# Altium PCB MicroMouse.PcbDoc (part 2 of 2)
Units mm, origin at the board's own origin, x right, y up, seen from the top; angles counter-clockwise.
Board outline 120.52 x 100.98 mm, 4 copper layers (Top Copper, Signal Layer 1, Signal Layer 2, Bottom Copper), stack 1.57 mm thick; 103 components, 72 nets, 374 pads, 447 vias.
Unrouted connection lines stored in the file: 1.
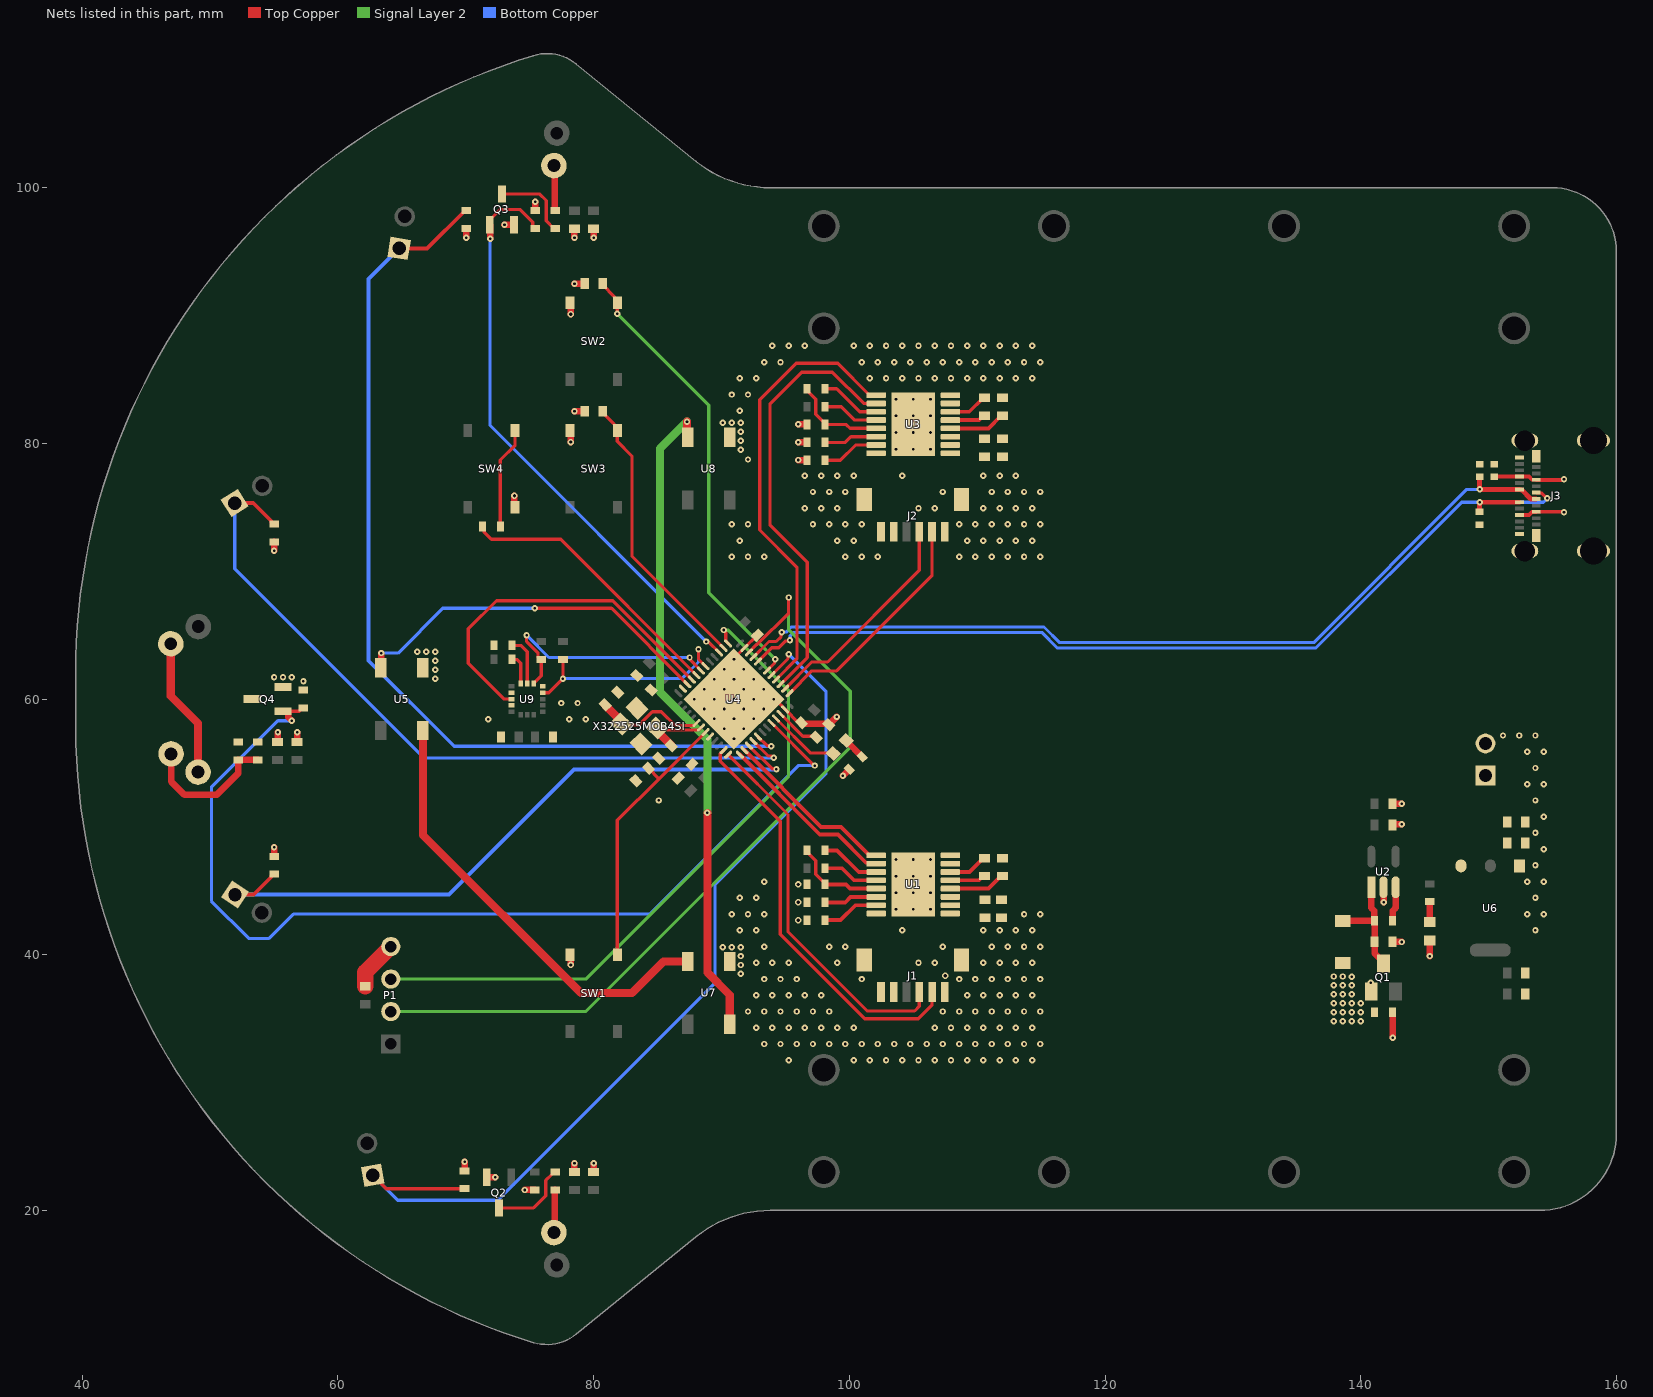
[diagram p4: the nets of this part, all layers, seen from the top]

## Via types
v1: diameter 0.5, hole 0.2, Top Copper to Bottom Copper, tented top, 353 vias
v2: diameter 0.5, hole 0.2, Top Copper to Bottom Copper, 61 vias
v3: diameter 0.508, hole 0.254, Top Copper to Bottom Copper, tented top, 33 vias

## Nets (pads, with @x,y where several pads share a name; then routed paths per layer and width w, separated by ;. In a path a pad name is that pad's centre, name@x,y a point inside that pad or via, vN(x,y) a via of type N, cw(c..) or ccw(c..) an arc to the next point about the centre after c; other vN are vias at no path point) (continued)
Emitter2_3: Q4.1 R25.2 U4.20 | length 78.7
  Top Copper w0.254: U4.20@93.912,58.126 93.915,58.126 97.241,54.8 v1(97.3,54.8)
  Top Copper w0.305: Q4.1@56.075,59.05 56.95,59.05 57.2,59.3 R25.2@57.3,59.3
  Top Copper w0.508: Q4.1@55.7,59.05 56.075,59.05 56.121,59.004 56.121,58.579 v1(56.4,58.3)
  Bottom Copper w0.254: v1(56.4,58.3) 55.3,58.3 50.1,53.1 50.1,44.2 53.025,41.275 54.61,41.275 56.515,43.18 84.38,43.18 96,54.8 v1(97.3,54.8)
Emitter4: Q3.1 R24.2 U4.39 | length 46.1
  Top Copper w0.254: Q3.1@71.875,97.1 71.875,97.475 72.7,98.3 74.225,98.3 75.235,97.29 75.235,96.948 75.383,96.8 R24.2@75.425,96.8 ; v1(88.8,64.5) 88.847,64.453 89,64.453 U4.39@89.811,63.642
  Top Copper w0.508: Q3.1@71.875,97.1 71.9,97.075 v1(71.9,96)
  Bottom Copper w0.254: v1(71.9,96) 71.9,81.4 v1(88.8,64.5)
EN_Left: U1.1 U4.14 | length 13.7
  Top Copper w0.305: U4.14@91.791,56.005 97.796,50 99.35,50 101.575,47.775 U1.1@102.1,47.775
EN_Right: U3.1 U4.28 | length 35.1
  Top Copper w0.254: U4.28@94.266,61.52 95.9,63.155 95.9,70.323 93,73.223 93,83.43 95.835,86.265 99.085,86.265 101.575,83.775 U3.1@102.1,83.775
GND: C3.2 C4.2 C5.2 C6.2 C9.1 C10.2 C11.2 C12.1 C13.1 C14.1 C15.1 C16.1 C17.1 C18.2 C19.1 C20.1 C21.2 C22.2 C23.2 C24.2 C25.2 C26.2 C27.2 C28.1 C29.1 C30.2 C31.2 C32.2 C33.2 C34.2 C35.2 C36.2 D2.A D3.A D4.A D12.2 J1.6 J1.7 J1.8 J2.6 J2.7 J2.8 J3.1 J3.2 J3.3 J3.4 J3.A1 J3.A12 J3.B1 J3.B12 J4.2 P1.4 Q2.2 Q3.2 Q4.2 R1.1 R2.1 R3.2 R5.2 R7.1 R8.1 R9.1 R16.1 R18.1 R23.1 R24.1 R25.1 R26.1 R27.1 R28.1 R29.1 SW1.2 SW2.2 SW3.2 SW4.3 U1.9 U1.15 U1.16 U1.17 U2.2 U3.9 U3.15 U3.16 U3.17 U4.8 U4.23 U4.35 U4.47 U4.49 U5.3 U6.1 U7.3 U8.3 U9.5 U9.10 U9.12 X322525MOB4SI.2 X322525MOB4SI.4 | length 37.2
  Top Copper w0.254: v2(90.978,63.111) 90.978,63.182 U4.35@91.791,63.995 C23.2@92.795,64.999 ; v2(94.089,60) 94.16,60 U4.23@94.973,59.187 94.976,59.187 96.005,58.157 C22.2@96.262,58.157
  Top Copper w0.508: R26.1@55,47.7 v1(55,48.4) ; v1(55,71.6) R27.1@55,72.3 ; C15.1@55.262,56.636 55.306,56.68 v1(55.306,57.394) ; C14.1@56.786,56.636 56.8,56.65 v1(56.8,57.4) ; R29.1@69.9,23.1 v1(69.9,23.8) ; v1(70.025,96.1) R28.1@70.025,96.8 ; Q2.2@71.65,22.6 v1(72.3,22.6) ; v1(73.025,97.1) Q3.2@73.775,97.1 ; v3(73.8,75.9) 73.8,75.05 SW4.3@73.85,75 ; v1(74.6,21.6) R23.1@75.4,21.6 ; R24.1@75.425,98.2 v1(75.425,98.9) ; SW1.2@78.15,40 78.2,39.95 v3(78.2,39.2) ; SW3.2@78.15,81.012 78.2,80.962 v3(78.2,80.1) ; SW2.2@78.15,91 78.2,90.95 v3(78.2,90.1) ; C13.1@78.5,23 v1(78.5,23.7) ; v1(78.5,82.5) C35.2@79.288,82.5 ; v1(78.5,92.5) C34.2@79.288,92.5 ; v1(78.5,96.1) C17.1@78.5,96.8 ; C12.1@80,23 v1(80,23.7) ; v1(80,96.1) C16.1@80,96.8 ; v1(96,78.7) 96.661,78.7 R8.1@96.68,78.681 ; v1(96,80.1) 96.659,80.1 R7.1@96.68,80.078 R7.1@96.68,80.078 ; v1(96,81.5) 96.659,81.5 96.68,81.479 R5.2@96.68,81.475 ; C22.2@96.262,58.157 96.332,58.086 98.212,58.086 98.294,58.004 98.404,58.004 v1(99,58.6) ; v1(99.5,54) R16.1@100.005,54.505 ; U2.2@141.78,45.277 141.8,45.257 v1(141.8,44.1) ; C29.1@142.48,41.017 142.497,41 v1(143.2,41) ; C20.1@142.48,50.161 142.519,50.2 v1(143.2,50.2) ; C28.1@142.48,51.812 142.492,51.8 v1(143.2,51.8) ; R9.1@142.491,35.496 142.491,33.509 v1(142.5,33.5) ; v1(145.4,39.9) D12.2@145.4,41.124
  Top Copper w1.27: C36.2@62.135,37.53 62.135,38.64 P1.4@64.135,40.64
  other v1: 95.25,31.75 100.33,31.75 101.6,31.75 102.87,31.75 104.14,31.75 105.41,31.75 106.68,31.75 107.95,31.75 109.22,31.75 110.49,31.75 111.76,31.75 113.03,31.75 114.3,31.75 93.345,33.02 94.615,33.02 95.885,33.02 97.155,33.02 98.425,33.02 99.695,33.02 100.965,33.02 102.235,33.02 103.505,33.02 104.775,33.02 106.045,33.02 107.315,33.02 108.585,33.02 109.855,33.02 111.125,33.02 112.395,33.02 113.665,33.02 114.935,33.02 92.71,34.29 93.98,34.29 95.25,34.29 96.52,34.29 97.79,34.29 99.06,34.29 100.33,34.29 106.68,34.29 107.95,34.29 109.22,34.29 110.49,34.29 111.76,34.29 113.03,34.29 114.3,34.29 92.075,35.56 93.345,35.56 94.615,35.56 95.885,35.56 97.155,35.56 98.425,35.56 107.315,35.56 108.585,35.56 109.855,35.56 111.125,35.56 112.395,35.56 113.665,35.56 114.935,35.56 92.71,36.83 93.98,36.83 95.25,36.83 96.52,36.83 97.79,36.83 109.22,36.83 110.49,36.83 111.76,36.83 113.03,36.83 114.3,36.83 93.345,38.1 94.615,38.1 95.885,38.1 100.965,38.1 108.585,38.1 109.855,38.1 111.125,38.1 112.395,38.1 113.665,38.1 114.935,38.1 91.5,38.5 91.5,39.2 92.71,39.37 93.98,39.37 95.25,39.37 99.06,39.37 105.41,39.37 106.68,39.37 110.49,39.37 111.76,39.37 113.03,39.37 114.3,39.37 91.5,39.9 90.1,40.6 90.8,40.6 91.5,40.6 93.345,40.64 98.425,40.64 99.695,40.64 107.315,40.64 111.125,40.64 112.395,40.64 113.665,40.64 114.935,40.64 91.44,41.91 92.71,41.91 104.14,41.91 110.49,41.91 111.76,41.91 113.03,41.91 114.3,41.91 153.67,41.91 90.805,43.18 92.075,43.18 93.345,43.18 113.665,43.18 114.935,43.18 153.035,43.18 154.305,43.18 91.44,44.45 92.71,44.45 153.67,44.45 93.345,45.72 153.035,45.72 154.305,45.72 153.67,46.99 154.305,48.26 153.67,49.53 154.305,50.8 85.09,52.07 153.67,52.07 153.035,53.34 154.305,53.34 153.67,54.61 153.035,55.88 154.305,55.88 151.13,57.15 152.4,57.15 153.67,57.15 71.755,58.42 78.105,58.42 79.375,58.42 77.47,59.69 78.74,59.69 57.3,61.4 67.6,61.6 55,61.7 55.7,61.7 56.4,61.7 67.6,62.3 67.6,63 66.2,63.7 66.9,63.7 67.6,63.7 90.805,71.12 92.075,71.12 93.345,71.12 99.695,71.12 100.965,71.12 102.235,71.12 108.585,71.12 109.855,71.12 111.125,71.12 112.395,71.12 113.665,71.12 114.935,71.12 91.44,72.39 99.06,72.39 100.33,72.39 109.22,72.39 110.49,72.39 111.76,72.39 113.03,72.39 114.3,72.39 90.805,73.66 92.075,73.66 97.155,73.66 98.425,73.66 99.695,73.66 100.965,73.66 108.585,73.66 109.855,73.66 111.125,73.66 112.395,73.66 113.665,73.66 114.935,73.66 96.52,74.93 97.79,74.93 99.06,74.93 105.41,74.93 106.68,74.93 110.49,74.93 111.76,74.93 113.03,74.93 114.3,74.93 97.155,76.2 98.425,76.2 99.695,76.2 107.315,76.2 111.125,76.2 112.395,76.2 113.665,76.2 114.935,76.2 96.52,77.47 97.79,77.47 99.06,77.47 100.33,77.47 104.14,77.47 110.49,77.47 111.76,77.47 113.03,77.47 92.075,78.74 91.5,79.5 91.5,80.2 91.5,80.9 90.1,81.6 90.8,81.6 91.5,81.6 91.44,82.55 90.805,83.82 92.075,83.82 91.44,85.09 92.71,85.09 101.6,85.09 102.87,85.09 104.14,85.09 105.41,85.09 106.68,85.09 107.95,85.09 109.22,85.09 110.49,85.09 111.76,85.09 113.03,85.09 114.3,85.09 93.345,86.36 94.615,86.36 100.965,86.36 102.235,86.36 103.505,86.36 104.775,86.36 106.045,86.36 107.315,86.36 108.585,86.36 109.855,86.36 111.125,86.36 112.395,86.36 113.665,86.36 114.935,86.36 93.98,87.63 95.25,87.63 96.52,87.63 100.33,87.63 101.6,87.63 102.87,87.63 104.14,87.63 105.41,87.63 106.68,87.63 107.95,87.63 109.22,87.63 110.49,87.63 111.76,87.63 113.03,87.63 114.3,87.63
  other v2: 103.65,43.55 105,43.55 106.35,43.55 103.65,44.85 105,44.85 106.35,44.85 103.65,46.15 105,46.15 106.35,46.15 103.65,47.45 105,47.45 106.35,47.45 90.978,56.889 90.2,57.667 91.755,57.667 89.422,58.444 90.978,58.444 92.533,58.444 88.644,59.222 90.2,59.222 91.755,59.222 93.311,59.222 87.866,60 89.422,60 90.978,60 92.533,60 88.644,60.778 90.2,60.778 91.755,60.778 93.311,60.778 89.422,61.556 90.978,61.556 92.533,61.556 90.2,62.333 91.755,62.333 103.65,79.55 105,79.55 106.35,79.55 103.65,80.85 105,80.85 106.35,80.85 103.65,82.15 105,82.15 106.35,82.15 103.65,83.45 105,83.45 106.35,83.45
  other v3: 107.5,38.356 96,42.7 96,44.1 96,45.5
IMU_INT: U4.45 U9.11 | length 28.2
  Top Copper w0.254: U9.11@73.575,60 73,60 70.2,62.8 70.2,65.5 72.4,67.7 81.51,67.7 U4.45@87.69,61.52
Left_EncoderA: J1.4 U4.12 | length 29.9
  Top Copper w0.254: U4.12@90.518,55.651 95.2,50.969 95.2,41.8 101.4,35.6 105.1,35.6 105.476,35.976 J1.4@105.476,37.081
Left_EncoderB: J1.5 U4.11 | length 32.5
  Top Copper w0.254: U4.11@90.164,56.005 89.9,55.74 89.9,55.14 94.6,50.44 94.6,41.6 101.2,35 105.4,35 106.474,36.074 106.474,37.079 J1.5@106.476,37.081
M1_Left: J1.1 U1.8
M1_Right: J2.1 U3.8
M2_Left: J1.2 U1.10
M2_Right: J2.2 U3.10
MCU_I2C1_SCL: R10.1 U4.42 U9.4 | length 17.2
  Top Copper w0.254: U9.4@76.025,60.5 76.5,60.5 v1(77.6,61.6) R10.1@77.6,63.1 ; v1(88.2,63.9) 88.2,63.131 U4.42@88.75,62.581
  Bottom Copper w0.254: v1(77.6,61.6) 86.9,61.6 88.2,62.9 v1(88.2,63.9)
MCU_I2C1_SDA: R14.1 U4.43 U9.6 | length 19.4
  Top Copper w0.254: v1(74.75,65) 74.75,64.5 75.652,63.598 75.652,63.248 75.8,63.1 R14.1@75.9,63.1 75.9,61.825 U9.6@75.3,61.225 ; v1(87.5,63.25) 87.547,63.203 87.547,63.077 U4.43@88.397,62.227
  Bottom Copper w0.254: v1(74.75,65) 76.5,63.25 v1(87.5,63.25)
MCU_LED: D5.1 U4.21 | length 5.6
  Top Copper w0.254: U4.21@94.266,58.48 96.969,55.776 98.706,55.776 D5.1@98.741,55.741
MCU_LED_K: D5.2 R16.2 | length 1.7
  Top Copper w0.508: D5.2@99.759,56.731 R16.2@100.995,55.495
MCU_OSC_IN: C11.1 U4.5 X322525MOB4SI.1 | length 8.9
  Top Copper w0.254: X322525MOB4SI.1@82.152,58.049 82.223,57.978 83.578,57.978 84.6,59 85.3,59 86.365,57.935 87.851,57.935 U4.5@88.043,58.126
  Top Copper w0.635: C11.1@80.895,59.554 80.895,59.543 82.152,58.286 X322525MOB4SI.1@82.152,58.049
MCU_OSC_OUT: C18.1 U4.6 X322525MOB4SI.3 | length 5.4
  Top Copper w0.254: X322525MOB4SI.3@84.945,57.731 85.614,57.731 85.764,57.581 88.205,57.581 U4.6@88.397,57.773
  Top Copper w0.635: X322525MOB4SI.3@84.945,57.731 84.945,57.494 86.076,56.364 C18.1@86.076,56.353
MCU_USB_D_N: D3.C J3.A6 J3.B6 U4.32 | length 73.2
  Top Copper w0.254: U4.32@92.851,62.934 93.922,64.005 94.48,64.005 95.025,64.551 95.309,64.551 v2(95.356,64.598) ; J3.B6@153.73,76.15 153.753,76.127 154.135,76.127 154.562,75.7 v2(154.6,75.7)
  Top Copper w0.381: D3.C@149.298,74.638 D3.C@149.298,74.638 149.299,75.399 v2(149.3,75.4) J3.A6@152.43,75.4
  Bottom Copper w0.254: v2(95.356,64.598) 95.379,64.622 95.379,64.958 95.633,65.212 115.052,65.212 116.268,63.997 136.497,63.997 147.9,75.4 v2(149.3,75.4) 154.3,75.4 v2(154.6,75.7)
MCU_USB_D_P: D4.C J3.A7 J3.B7 U4.33 | length 68.9
  Top Copper w0.254: U4.33@92.498,63.288 93.715,64.505 94.273,64.505 94.657,64.89 94.657,65.173 v2(94.705,65.22)
  Top Copper w0.381: D4.C@149.304,77.376 149.302,77.374 149.302,76.402 v2(149.3,76.4) J3.A7@152.43,76.4 ; J3.A7@152.59,76.359 153.299,75.65 J3.B7@153.73,75.65
  Bottom Copper w0.254: v2(94.705,65.22) 94.728,65.244 95.065,65.244 95.458,65.636 115.228,65.636 116.443,64.421 136.321,64.421 148.3,76.4 v2(149.3,76.4)
NetC1_1: C1.1 U1.14 | length 3.1
  Top Copper w0.305: U1.14@107.9,46.475 109.398,46.475 110.479,47.556 C1.1@110.579,47.556
NetC1_2: C1.2 U1.13 | length 2.8
  Top Copper w0.305: U1.13@107.9,45.825 110.148,45.825 110.479,46.156 C1.2@110.579,46.156
NetC7_1: C7.1 U3.14 | length 3.1
  Top Copper w0.305: U3.14@107.9,82.475 109.381,82.475 110.471,83.565 C7.1@110.571,83.565
NetC7_2: C7.2 U3.13 | length 2.8
  Top Copper w0.305: U3.13@107.9,81.825 110.131,81.825 110.471,82.165 C7.2@110.571,82.165
NetC9_2: C9.2 U4.22 | length 3.5
  Top Copper w0.254: U4.22@94.619,58.833 96.368,57.085 97.334,57.085 C9.2@97.405,57.014
NetC29_2: C29.2 D1.1 Q1.3 R30.1 U2.1 | length 8.6
  Top Copper w0.508: D1.1@138.63,42.668 R30.1@141.08,42.668 141.059,42.689 141.059,43.433 140.83,43.662 U2.1@140.83,45.277 ; R30.1@141.08,42.589 C29.2@141.08,41.017 141.08,40.123 Q1.3@141.78,39.423
NetD6_1: D6.1 R11.2 | length 3.4
  Top Copper w0.508: D6.1@76.889,18.265 76.945,18.321 76.945,21.579 76.966,21.6 R11.2@77,21.6
NetD7_1: D7.1 D11.2 | length 10.9
  Top Copper w0.635: D7.1@46.923,64.327 46.923,60.243 49.053,58.113 D11.2@49.053,54.29
NetD8_1: D8.1 R20.2 | length 3.6
  Top Copper w0.508: D8.1@76.889,101.732 76.945,101.676 76.945,98.221 76.966,98.2 R20.2@77,98.2
NetD11_1: D11.1 R21.1 R22.1 | length 11.1
  Top Copper w0.508: D11.1@46.947,55.71 46.947,53.553 48,52.5 50.5,52.5 52.214,54.214 R21.1@52.214,55.236 R22.1@53.738,55.236
NetD12_1: D12.1 R31.1 | length 1.6
  Top Copper w0.508: D12.1@145.4,42.564 R31.1@145.4,44.15
NetQ2_3: Q2.3 R11.1 | length 6.3
  Top Copper w0.254: Q2.3@72.6,20.2 75.3,20.2 76.25,21.15 76.25,22.35 76.752,22.852 76.9,23 R11.1@77,23
NetQ3_3: Q3.3 R20.1 | length 6.2
  Top Copper w0.254: Q3.3@72.825,99.5 75.8,99.5 76.3,99 76.3,97.4 76.9,96.8 R20.1@77,96.8
NetQ4_3: Q4.3 R21.2 R22.2
NetR1_2: R1.2 U1.6 | length 4.2
  Top Copper w0.305: R1.2@98.08,44.103 99.678,44.103 100.1,44.525 U1.6@102.1,44.525
NetR2_2: R2.2 U1.7 | length 4.5
  Top Copper w0.3: R2.2@98.08,42.706 99.306,42.706 100.475,43.875 U1.7@102.1,43.875
NetR3_1: R3.1 R4.2 U1.5 | length 7.4
  Top Copper w0.254: R4.2@96.68,48.167 96.68,48.067 97.38,47.367 97.38,46.3 98.08,45.6 R3.1@98.08,45.5
  Top Copper w0.305: R3.1@98.08,45.5 99.726,45.5 100.051,45.175 U1.5@102.1,45.175
NetR4_1: R4.1 U1.3 | length 4.7
  Top Copper w0.305: R4.1@98.08,48.167 99.043,48.167 100.735,46.475 U1.3@102.1,46.475
NetR5_1: R5.1 R6.2 U3.5 | length 7.5
  Top Copper w0.254: R6.2@96.68,84.269 96.68,84.169 97.38,83.469 97.38,82.275 98.08,81.575 R5.1@98.08,81.475 99.752,81.475 100.051,81.175 U3.5@102.1,81.175
NetR6_1: R6.1 U3.3 | length 4.8
  Top Copper w0.254: R6.1@98.08,84.269 99.005,84.269 100.798,82.475 U3.3@102.1,82.475
NetR7_2: R7.2 U3.6 | length 4.2
  Top Copper w0.254: R7.2@98.08,80.078 99.678,80.078 100.125,80.525 U3.6@102.1,80.525
NetR8_2: R8.2 U3.7 | length 4.5
  Top Copper w0.254: R8.2@98.08,78.681 99.304,78.681 100.499,79.875 U3.7@102.1,79.875
NetR12_2: R12.2 U1.4 | length 4.4
  Top Copper w0.305: R12.2@98.08,46.77 99.416,46.77 100.361,45.825 U1.4@102.1,45.825
NetR13_2: R13.2 U3.4 | length 4.5
  Top Copper w0.254: R13.2@98.08,82.872 99.378,82.872 100.425,81.825 U3.4@102.1,81.825
NetR17_1: R17.1 SW4.4 | length 8
  Top Copper w0.254: R17.1@72.7,73.5 72.7,78.7 73.85,79.85 SW4.4@73.85,81
NetR17_2: R17.2 U4.44 | length 21.7
  Top Copper w0.254: R17.2@71.3,73.5 71.448,73.352 71.448,73.052 72,72.5 77.417,72.5 U4.44@88.043,61.874
NetR18_2: R18.2 U9.7 | length 3.9
  Top Copper w0.254: R18.2@73.6,64.2 74.3,64.2 74.8,63.7 U9.7@74.8,61.225
NetR19_2: R19.2 U9.8 | length 2.4
  Top Copper w0.254: R19.2@73.6,63.1 74,63.1 74.3,62.8 U9.8@74.3,61.225
NetR30_2: R30.2 U2.3 | length 2.7
  Top Copper w0.508: R30.2@142.48,42.668 142.501,42.689 142.501,43.433 142.73,43.662 U2.3@142.73,45.277
NetU5_2: U5.2 U7.4 | length 35
  Top Copper w0.635: U5.2@66.65,57.55 66.65,49.35 79,37 83,37 85.462,39.462 U7.4@87.35,39.462
NetU7_2: U7.2 U8.4 | length 51.5
  Top Copper w0.635: v1(87.3,81.7) 87.3,80.523 U8.4@87.35,80.473 ; v1(88.9,51.1) 88.9,38.6 90.65,36.85 U7.2@90.65,34.562
  Signal Layer 2 w0.635: v1(87.3,81.7) 85.2,79.6 85.2,60.545 88.9,56.845 v1(88.9,51.1)
PH_Left: U1.2 U4.13 | length 14.2
  Top Copper w0.305: U4.13@91.437,55.651 97.688,49.4 99.1,49.4 101.302,47.198 102.027,47.198 U1.2@102.1,47.125
PH_Right: U3.2 U4.27 | length 34.3
  Top Copper w0.254: U4.27@94.619,61.167 96.7,63.248 96.7,70.7 93.8,73.6 93.8,83.094 96.271,85.565 98.671,85.565 101.112,83.125 U3.2@102.1,83.125
PROG1: C34.1 SW2.4 U4.30 | length 36.1
  Top Copper w0.254: C34.1@80.7,92.512 80.7,92.412 81.627,91.485 81.627,91.223 SW2.4@81.85,91 v2(81.85,90.15) ; U4.30@93.559,62.227 94.153,62.822 94.153,63.053 v2(94.2,63.1)
  Signal Layer 2 w0.254: v2(81.85,90.15) 89,83 89,68.3 v2(94.2,63.1)
PROG2: C35.1 SW3.4 U4.38 | length 22.4
  Top Copper w0.254: C35.1@80.7,82.512 80.7,82.412 81.627,81.485 81.627,81.235 SW3.4@81.85,81.012 81.85,80.15 83,79 83,71.16 U4.38@90.164,63.995
Receiver1: D9.1 R26.2 U4.15 | length 53.1
  Top Copper w0.254: U4.15@92.144,56.358 93.959,54.544 94.256,54.544 v1(94.3,54.5)
  Top Copper w0.305: D9.1@51.947,44.71 53.41,44.71 54.777,46.077 54.777,46.177 54.9,46.3 R26.2@55,46.3
  Bottom Copper w0.305: D9.1@51.947,44.71 68.681,44.71 78.471,54.5 v1(94.3,54.5)
Receiver2: D10.1 R27.2 U4.16 | length 59.4
  Top Copper w0.254: U4.16@92.498,56.712 93.663,55.547 93.886,55.547 94.033,55.4 v1(94.1,55.4)
  Top Copper w0.305: D10.1@51.923,75.327 53.373,75.327 54.777,73.923 54.777,73.823 54.9,73.7 R27.2@55,73.7
  Bottom Copper w0.254: D10.1@51.923,75.327 51.923,70.177 66.7,55.4 v1(94.1,55.4)
Receiver3: D16.1 R28.2 U4.17 | length 75.4
  Top Copper w0.254: U4.17@92.851,57.066 93.57,56.347 93.866,56.347 v1(93.906,56.306)
  Top Copper w0.305: D16.1@64.779,95.249 66.974,95.249 69.925,98.2 R28.2@70.025,98.2
  Bottom Copper w0.305: D16.1@64.779,95.249 62.4,92.87 62.4,63 69.094,56.306 v1(93.906,56.306)
Receiver4: D15.1 R29.2 U4.29 | length 74.9
  Top Copper w0.254: D15.1@62.721,22.749 63.77,21.7 R29.2@69.9,21.7 ; U4.29@93.912,61.874 95.203,63.165 95.203,63.453 v2(95.25,63.5)
  Bottom Copper w0.254: D15.1@62.721,22.749 64.67,20.8 72.5,20.8 89.5,37.8 89.5,45.5 98.182,54.182 98.182,60.568 v2(95.25,63.5)
Reset: C10.1 SW1.4 U4.7 | length 21.4
  Top Copper w0.254: SW1.4@81.85,40 81.85,50.519 85.116,53.784 ; C10.1@84.295,54.595 85.106,53.784 85.116,53.784 ; U4.7@88.75,57.419 85.116,53.784
RGB1: U4.46 U5.4 | length 29
  Top Copper w0.254: v1(75.4,67.1) 81.403,67.1 U4.46@87.336,61.167
  Top Copper w0.508: U5.4@63.35,62.45 63.4,62.5 v1(63.4,63.6)
  Bottom Copper w0.254: v1(63.4,63.6) 64.7,63.6 68.2,67.1 v1(75.4,67.1)
Right_EncoderA: J2.4 U4.26 | length 17.4
  Top Copper w0.254: U4.26@94.973,60.813 97.06,62.9 98.3,62.9 105.471,70.071 J2.4@105.471,73.09
Right_EncoderB: J2.5 U4.25 | length 18.4
  Top Copper w0.254: U4.25@95.326,60.46 97.067,62.2 99,62.2 106.471,69.671 J2.5@106.471,73.09
SWDCLK: P1.3 U4.37 | length 52.6
  Top Copper w0.254: v2(90.17,65.405) 90.17,65.338 90.326,65.182 90.326,64.54 U4.37@90.518,64.349
  Signal Layer 2 w0.254: P1.3@64.135,38.1 79.375,38.1 95.25,53.975 95.25,60.648 90.524,65.374 90.201,65.374 v2(90.17,65.405)
SWIO: P1.2 U4.34 | length 63.8
  Top Copper w0.254: U4.34@92.144,63.642 92.774,64.271 92.808,64.271 95.25,66.713 v2(95.25,67.945)
  Signal Layer 2 w0.254: P1.2@64.135,35.56 79.375,35.56 100.062,56.247 100.062,60.604 95.25,65.416 v2(95.25,67.945)
VBAT: C2.1 C3.1 C4.1 C5.1 C6.1 C8.1 C30.1 C31.1 J4.1 U1.11 U3.11 U6.3
VBUS: D1.2 D2.C J3.A4 J3.A9 J3.B4 J3.B9 Q1.1 R9.2 | length 9.2
  Top Copper w0.305: D2.C@150.441,77.376 150.463,77.398 152.428,77.398 J3.A9@152.43,77.4 153.157,77.4 153.404,77.152 153.728,77.152 J3.B4@153.73,77.15 155.797,77.15 155.847,77.2 v2(155.9,77.2) ; J3.A4@152.43,74.4 153.157,74.4 153.404,74.648 153.728,74.648 J3.B9@153.73,74.65 155.797,74.65 155.847,74.6 v2(155.9,74.6)
  other v1: 137.9,34.8 138.6,34.8 139.3,34.8 140,34.8 137.9,35.5 138.6,35.5 139.3,35.5 140,35.5 137.9,36.2 138.6,36.2 139.3,36.2 140,36.2 137.9,36.9 138.6,36.9 139.3,36.9 137.9,37.6 138.6,37.6 139.3,37.6 140.8,37.8 139.307,38.286 137.9,38.3 138.6,38.3
VCP: C2.2 U1.12 | length 4.5
  Top Copper w0.305: U1.12@107.9,45.175 110.895,45.175 111.876,46.156 C2.2@111.976,46.156
VCP2: C8.2 U3.12 | length 4.5
  Top Copper w0.305: U3.12@107.9,81.175 110.881,81.175 111.871,82.165 C8.2@111.971,82.165
pads on no net: J3.A2 J3.A3 J3.A5 J3.A8 J3.A10 J3.A11 J3.B2 J3.B3 J3.B5 J3.B8 J3.B10 J3.B11 SW1.1 SW1.3 SW2.1 SW2.3 SW3.1 SW3.3 SW4.1 U2.4 U4.2 U4.3 U4.4 U4.10 U4.18 U4.31 U4.40 U4.41 U8.2 U9.2 U9.3 U9.9 U9.13 U9.15 U9.16

## Polygon pours and split planes (outlines as drawn)
VBAT on Top Copper "Top Copper-VBAT" (solid, pour order 11): 144,46.4 148.65,46.4 148.65,48.2 151.9,48.2 151.9,54.6 151.4,55.1 148,55.1 145.797,57.303 ccw(c143.873,55.379) 143.873,58.1 cw(c143.873,64.335) 139.464,59.926 115.09,84.3 111.3,84.3 111.3,82.865 112.435,82.865 112.6,82.7 112.6,81.7 111.654,80.754 107.15,80.754 107.15,80.304 109.3,80.304 109.938,79.665 112.635,79.665 132.3,60 cw(c131.513,59.213) 131.513,58.1 119.6,58.1 111.3,49.8 111.3,46.856 112.444,46.856 112.6,46.7 112.6,45.6 111.75,44.75 107.15,44.75 107.15,44.3 109.3,44.3 109.9,43.7 113.2,43.7 122.5,53 143,53 144,52
3V3 on Top Copper "NONET_L-01_P-001" (solid, pour order 47): 62,58.7 64.5,58.7 64.5,55.6 62,55.6
3V3 on Top Copper "NONET_L-01_P-001" (solid, pour order 46): 86.2,35.7 88.7,35.7 88.7,32.6 86.2,32.6
GND on Top Copper "NONET_L-01_P-001" (solid, pour order 44): 148.2,81.4 148.2,70.5 155.1,70.5 155.1,81.4
VBUS on Top Copper "NONET_L-01_P-001" (solid, pour order 41): 137.5,40.5 139.7,40.5 139.7,39.653 141.7,37.653 141.7,34.4 137.5,34.4
GND on Top Copper "NONET_L-01_P-001" (solid, pour order 39): 65.9,64.1 68,64.1 68,61.2 65.9,61.2
GND on Top Copper "NONET_L-01_P-001" (solid, pour order 37): 54.6,62.1 54.6,60.4 57.9,60.4 57.9,62.1
5V on Top Copper "Top Copper-5V" (solid, pour order 36): 147.1,36.1 151.9,36.1 151.9,45.1 151.3,45.7 151.3,47.85 149.15,47.85 149.15,46.1 144.9,46.1 144.9,45.1 145.9,45.1 146.6,44.4 146.6,40.1 144.973,38.473 142.1,38.473 142.1,36.4 147.1,36.4
3V3 on Top Copper "NONET_L-01_P-001" (solid, pour order 33): 141.6,52.6 141.6,46.8 138,46.8 138,52.6
GND on Top Copper "Top Copper-GND" (solid, pour order 31): 152.4,36.1 155.15,36.1 155.15,58.1 148.4,58.1 148.4,55.6 151.65,55.6 152.4,54.85 152.4,47.85 151.9,47.85 151.9,45.975 152.4,45.475
5V on Top Copper "NONET_L-01_P-001" (solid, pour order 29): 78.075,97.875 80.425,97.875 80.425,103.775 78.7,105.5 77,105.5 77,102.997 77.003,103 78,103 78.6,102.4 78.6,101.3 78.075,100.775
5V on Top Copper "NONET_L-01_P-001" (solid, pour order 27): 80.425,21.925 80.425,16.125 78.8,14.5 77,14.5 77,17 77.9,17 78.6,17.7 78.6,18.9 78.075,19.425 78.075,21.925
5V on Top Copper "NONET_L-01_P-001" (solid, remove dead copper, pour order 24): 54.6,55.9 57.5,55.9 57.5,52.9 53.3,48.7 41.2,48.7 41.2,50.9 52.211,50.9 54.6,53.289
NetQ4_3 on Top Copper "NONET_L-01_P-001" (solid, remove dead copper, pour order 19): 52.625,60.3 51.839,59.514 51.839,56.361 54.113,56.361 54.113,60.3
GND on Top Copper "NONET_L-01_P-001" (solid, remove dead copper, pour order 18): 115.5,89 115.5,70 89.7,70 89.7,84.2 94.5,89
M2_Right on Top Copper "NONET_L-01_P-001" (solid, pour order 17): 103.171,72.312 103.771,72.312 103.771,74.782 106.995,78.006 109.195,78.006 109.595,78.406 109.595,79.706 109.195,80.106 107.145,80.106 107.145,79.656 108.745,79.656 108.895,79.506 108.895,78.856 108.645,78.606 106.595,78.606 103.171,75.182 103.171,72.315
M1_Right on Top Copper "NONET_L-01_P-001" (solid, remove dead copper, pour order 16): 102.171,72.312 102.845,72.312 102.845,79.45 101.35,79.45 101.35,77.451 102.193,76.608
GND on Top Copper "Top Copper-GND 1" (solid, remove dead copper, pour order 40): 80.2,55.6 84.793,51.007 91.493,57.707 81.5,67.7 71.2,67.7 71.2,55.6
GND on Top Copper "NONET_L-01_P-001" (solid, remove dead copper, pour order 34): 115.5,50 115.5,31 94.5,31 89.7,35.8 89.7,50
M2_Left on Top Copper "NONET_L-01_P-001" (solid, pour order 14): 103.176,36.306 103.776,36.306 103.776,38.776 107,42 109.2,42 109.6,42.4 109.6,43.7 109.2,44.1 107.15,44.1 107.15,43.65 108.75,43.65 108.9,43.5 108.9,42.85 108.65,42.6 106.6,42.6 103.176,39.176 103.176,36.31
M1_Left on Top Copper "NONET_L-01_P-001" (solid, remove dead copper, pour order 13): 102.176,36.306 102.85,36.306 102.85,43.45 101.35,43.45 101.35,41.45 102.198,40.602
GND on Signal Layer 1 "NONET_L-01_P-001" (solid, pour order 43): 37.8,118.9 176.8,118.9 176.8,6.4 37.8,6.4
3V3 on Signal Layer 2 "NONET_L-01_P-001" (solid, pour order 45): 141.6,46.8 118.9,24.1 61.7,24.1 53,32.8 53,76.932 71.068,95 99.2,95 141.6,52.6
VBUS on Signal Layer 2 "NONET_L-01_P-001" (solid, remove dead copper, pour order 38): 137.3,38.8 151.6,38.8 155.3,42.5 155.3,79.3 159.8,79.3 159.8,41 153,34.2 137.3,34.2

## Keep-outs
Top Copper:
  rectangle: 114,65 136,99
  rectangle: 114,21 136,55
  rectangle: 94.615,85.725 155.321,99.949
  rectangle: 94.615,20.066 155.321,34.29

## Silkscreen, mask and mechanical layers (free items; w line width, h text height)
Top Overlay:
  circle w0.508: c76.339,50.8 r1.061
  lines w0.254: 114,21 136,21 136,55 114,55 114,21 ; 114,65 136,65 136,99 114,99 114,65
  lines w0.508: 75.589,53 76.339,53.75 ; 76.339,52 76.339,53.75 ; 77.589,50.8 79.339,50.8 ; 78.589,51.55 79.339,50.8 ; 76.339,53.75 76.339,53.75 ; 76.339,53.75 77.089,53 76.339,53.75 ; 76.339,53.75 76.339,53.75 ; 79.339,50.8 79.339,50.8 ; 79.339,50.8 78.589,50.05 79.339,50.8 ; 79.339,50.8 79.339,50.8
  text "DFU BOOT" at 68.779,73.954 h2.03 r90
  text "MICROMOUSE /  / DESIGNED BY: WEYMEN KOO /  / REV 1.0" at 147.229,70.294 h2.03 r90
  text "STM32F411CEU" at 103.329,54.666 h2.03 r90
  text "Y" at 76.846,54.2 h2.03 r90
  text "8.4V MAX" at 146.879,51.747 h2.03 r90
  text "Z" at 76.846,50.536 h2.03 r90
  text "X" at 80.9,50.349 h2.03 r90
  text "IMU" at 74.529,49.188 h2.03 r90
  text "GND" at 65.542,39.861 h2.03
  text "SWDCLK" at 65.542,37.321 h2.03
  text "SWIO" at 65.542,34.781 h2.03
  text "RESET" at 76.529,33.327 h2.03 r90
  text "3V3" at 65.542,32.241 h2.03